# Altium PCB E17-PDU-PCB.PcbDoc
Units mil, origin at the board's own origin, x right, y up, seen from the top; angles counter-clockwise.
Board outline 3061.02 x 4267.72 mil, 2 copper layers (Top Layer, Bottom Layer); 119 components, 92 nets, 474 pads, 36 vias.
Unrouted connection lines stored in the file: 2.
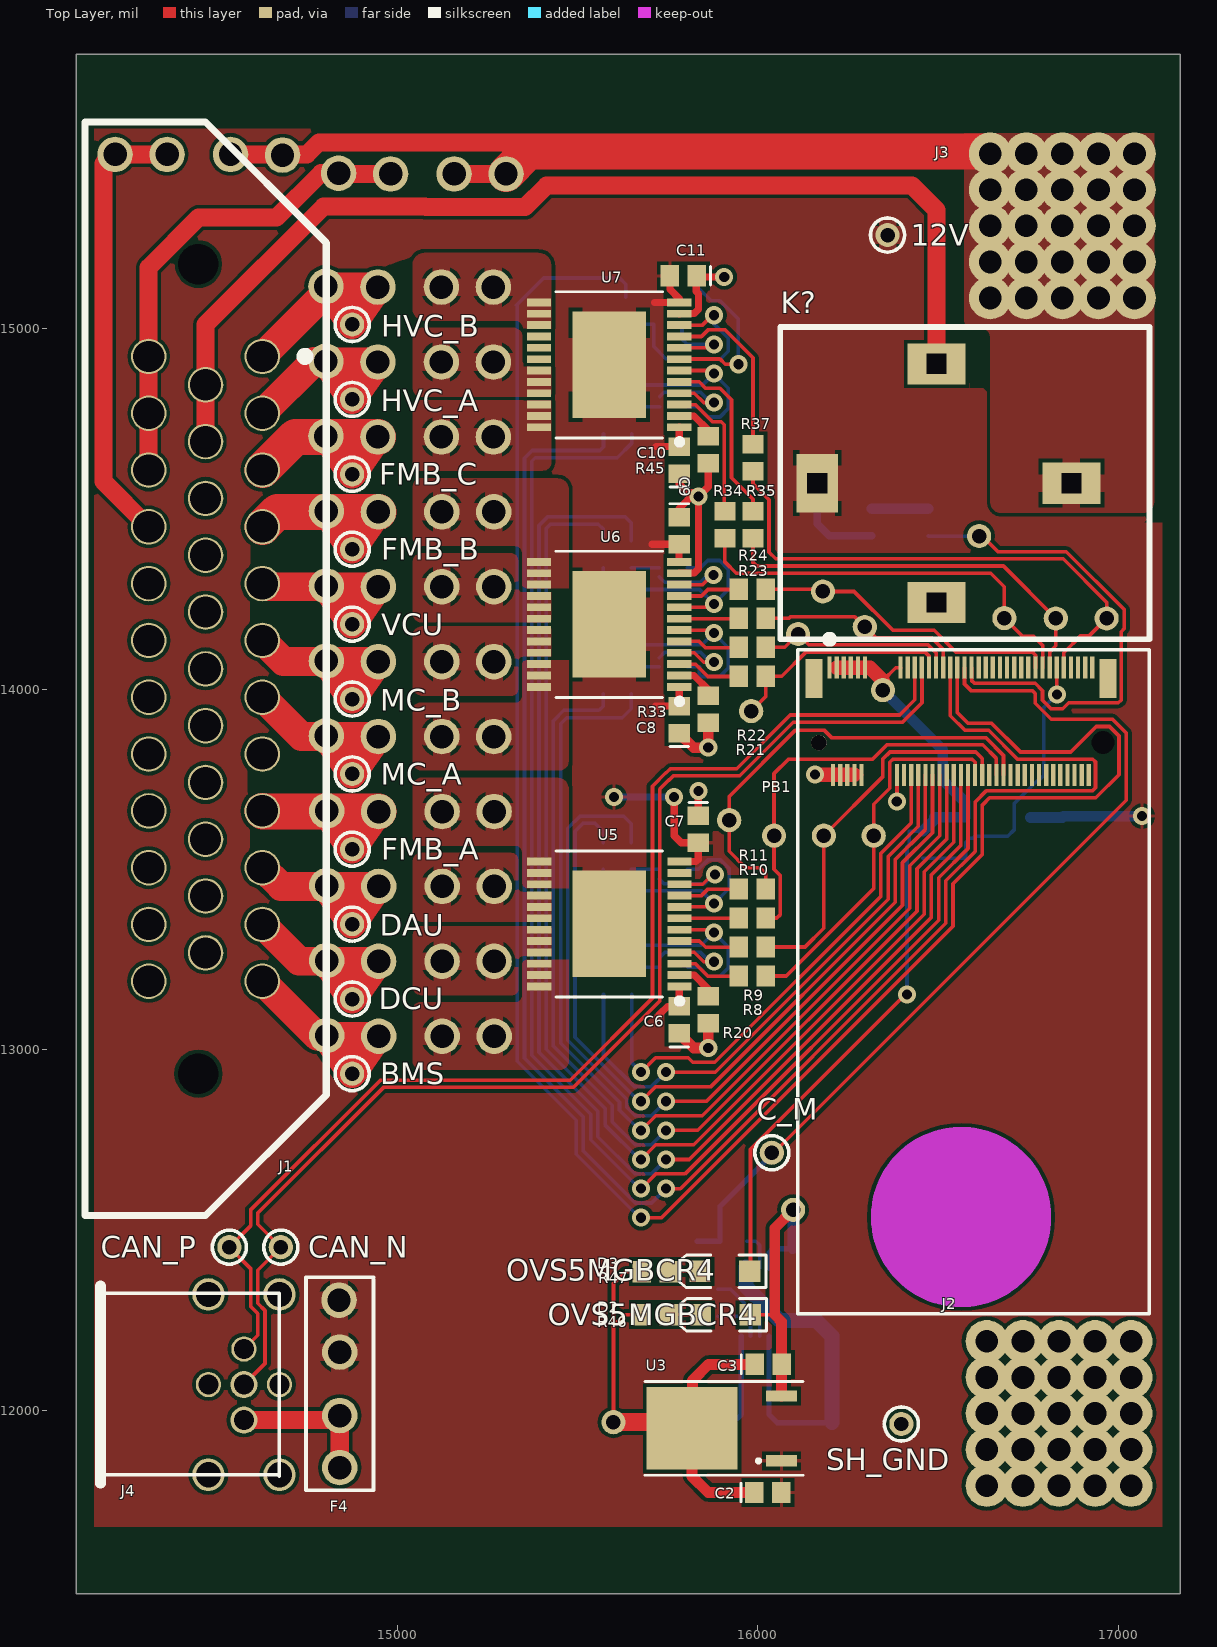
[diagram p0: Top Layer view]
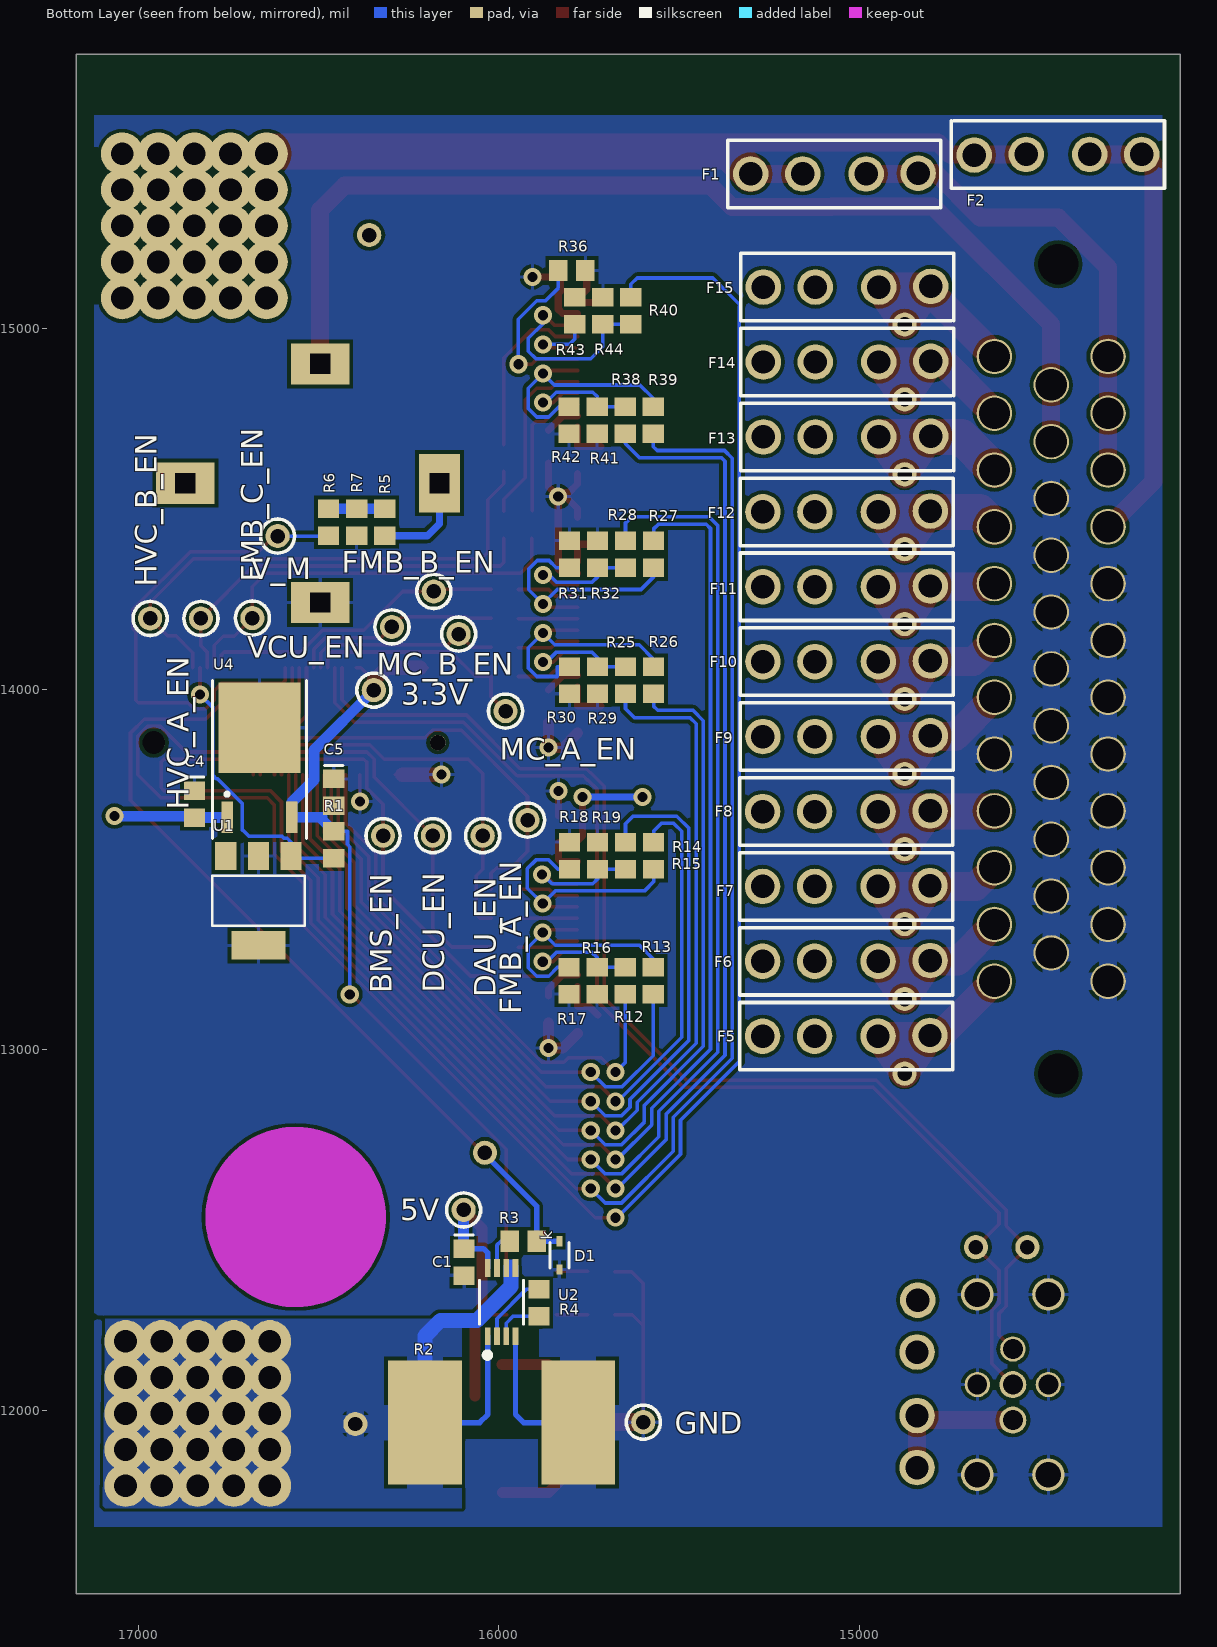
[diagram p1: Bottom Layer view, seen from below]
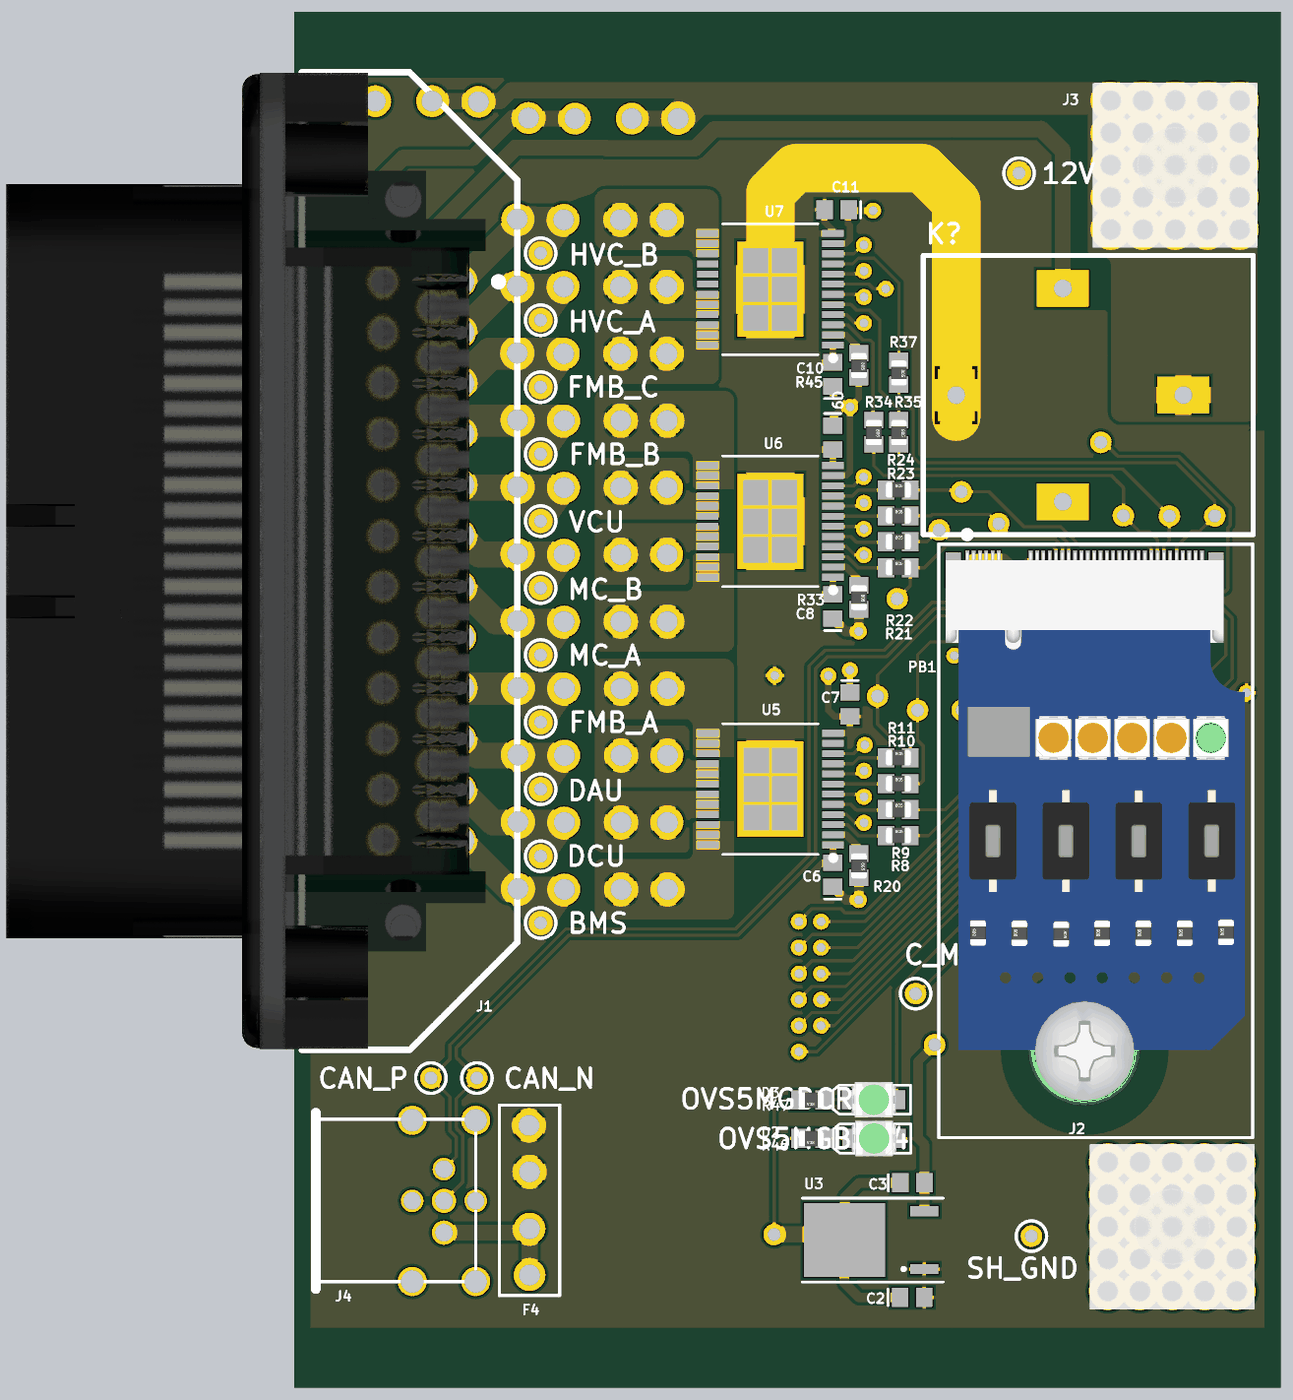
[diagram p2: 3D render of the assembled board from above, using the file's embedded part models]
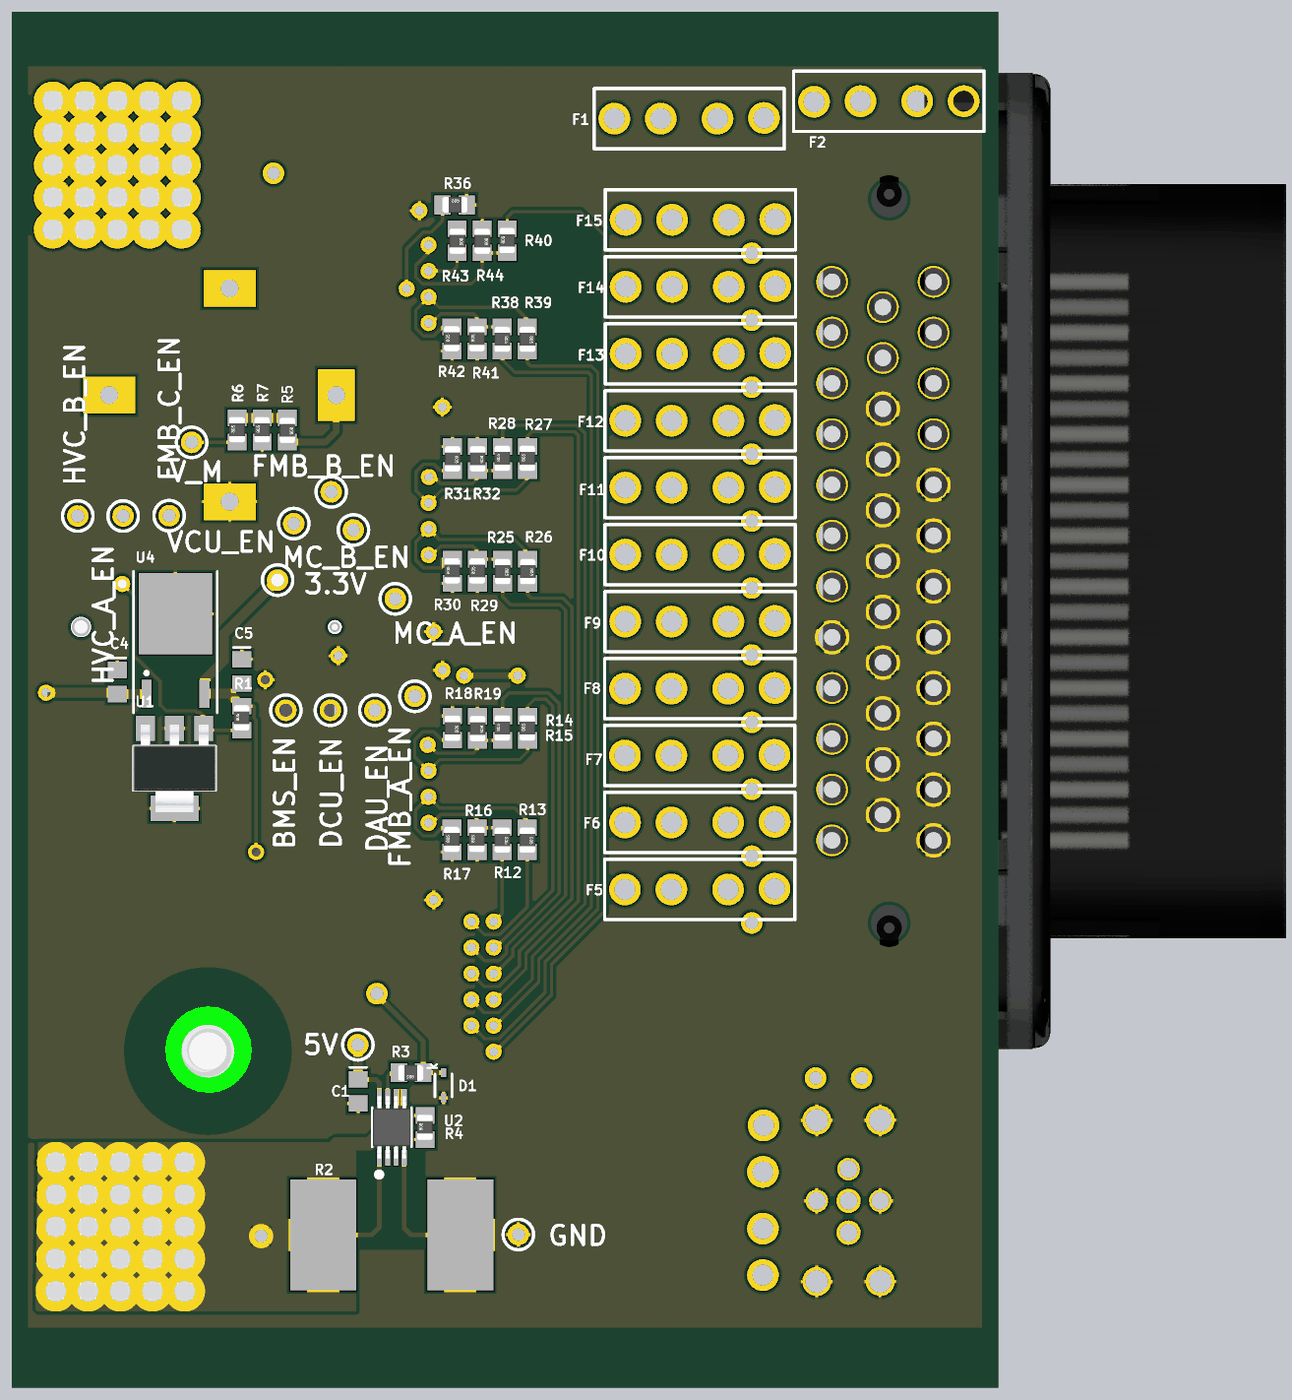
[diagram p3: 3D render of the assembled board from below, using the file's embedded part models]

## Layer stack, top to bottom
Top Solder: solder mask 0.4, Solder Resist, Dk 3.5
Top Layer: signal copper 1.4
Dielectric 1: dielectric 12.6, FR-4, Dk 4.8
Bottom Layer: signal copper 1.4
Bottom Solder: solder mask 0.4, Solder Resist, Dk 3.5

## Board outline
14110.24,11492.13 17171.26,11492.13 17171.26,15759.84 14110.23,15759.84

## Design rules (kind name [scope] priority, off if disabled: settings)
BoardOutlineClearance [All] p1: gap=50 ignorepadtopadclearanceinfootprint=FALSE
Clearance Clearance_PB-Pads [(InComponent('PB1') AND IsPad) vs IsTrack] p1: gap=8 ignorepadtopadclearanceinfootprint=FALSE except(0: Arc-Hole Track-Hole SMDPad-Hole THPad-Hole Via-Hole Fill-Hole Poly-Hole Region-Hole Text-Hole)
Clearance Clearance_Pads [IsPad vs IsPad] p2: gap=7.87 ignorepadtopadclearanceinfootprint=FALSE except(0: Arc-Hole Track-Hole SMDPad-Hole THPad-Hole Via-Hole Fill-Hole Poly-Hole Region-Hole Text-Hole)
Clearance [All] p3: gap=10 ignorepadtopadclearanceinfootprint=FALSE except(0: Arc-Hole Track-Hole SMDPad-Hole THPad-Hole Via-Hole Fill-Hole Poly-Hole Region-Hole Text-Hole)
DiffPairsRouting [All] p1: maxlimit=10 minlimit=10 mostfreqgap=10 toplayer_minwidth=10 toplayer_maxwidth=15 toplayer_prefwidth=10 bottomlayer_minwidth=10 bottomlayer_maxwidth=15 bottomlayer_prefwidth=10 maxuncoupledlength=500
HoleSize [All] p1: absolutevalues=TRUE maxlimit=1000 minlimit=1 maxpercent=80.000 minpercent=20.000
PolygonConnect PolygonConnect_LOAD-SWITCH_GND [HasFootprint('PowerSSO-24') vs InNet('12V')] p1: connectstyle=Relief reliefconductorwidth=150 reliefentries=4 polygonreliefangle="90 Angle" airgapwidth=10
PolygonConnect PolygonConnect_LOAD-SWITCHES [All vs HasFootprint('PowerSSO-24')] p2: connectstyle=Direct reliefconductorwidth=100 reliefentries=4 polygonreliefangle="90 Angle" airgapwidth=10
PolygonConnect PolygonConnect_SHANKS [All vs HasFootprint('7461098')] p3: connectstyle=Direct reliefconductorwidth=10 reliefentries=4 polygonreliefangle="90 Angle" airgapwidth=10
PolygonConnect PolygonConnect_Relay [InNet('12V') vs HasFootprint('CB1AH-P-12V')] p4: connectstyle=Relief reliefconductorwidth=100 reliefentries=4 polygonreliefangle="90 Angle" airgapwidth=10
PolygonConnect PolygonConnect_Curr-Resistor [InNet('GND') OR InNet('SHANK_GND') vs HasFootprint('PSR500HTQFC0L20')] p5: connectstyle=Relief reliefconductorwidth=100 reliefentries=4 polygonreliefangle="90 Angle" airgapwidth=10
PolygonConnect PolygonConnect_GND [InNet('GND') vs HasFootprint('TE-1-776163-1')] p6: connectstyle=Relief reliefconductorwidth=50 reliefentries=4 polygonreliefangle="90 Angle" airgapwidth=10
PolygonConnect PolygonConnect_12V [InNet('12V') vs (HasFootprint('BK-6013') OR HasFootprint('PowerSSO-24') OR HasFootprint('TEST POINT 5000K'))] p7: connectstyle=Relief reliefconductorwidth=50 reliefentries=4 polygonreliefangle="90 Angle" airgapwidth=10
PolygonConnect PolygonConnect_Loads [(InNet('NetF5_1') OR InNet('NetF6_1') OR InNet('NetF7_1') OR InNet('NetF8_1') OR InNet('NetF9_1') OR InNet('NetF10_1') OR InNet('NetF11_1') OR InNet('NetF12_1') OR InNet('NetF13_1') OR InNet('NetF14_1') OR InNet('NetF15_1') OR InNet('NetF2_3') OR InNet('NetF1_3') OR InNet('NetF4_1')OR InNet('SHANK_GND') OR InNet('NetF3_3') OR InNet('NetF1_1')) vs (InNet('NetF5_1') OR InNet('NetF6_1') OR InNet('NetF7_1') OR InNet('NetF8_1') OR InNet('NetF9_1') OR InNet('NetF10_1') OR InNet('NetF11_1') OR InNet('NetF12_1') OR InNet('NetF13_1') OR InNet('NetF14_1') OR InNet('NetF15_1') OR InNet('NetF2_3') OR InNet('NetF1_3') OR InNet('NetF4_1') OR InNet('SHANK_GND') OR InNet('NetF3_3') OR InNet('NetF1_1'))] p8: connectstyle=Relief reliefconductorwidth=50 reliefentries=4 polygonreliefangle="90 Angle" airgapwidth=10
PolygonConnect [All] p9: connectstyle=Relief reliefconductorwidth=10 reliefentries=4 polygonreliefangle="90 Angle" airgapwidth=10
RoutingVias [All] p1: holewidth=28 width=50 viastyle="Through Hole" minholewidth=28 minwidth=50 maxholewidth=28 maxwidth=50
SilkToSilkClearance [All] p1: silktosilkclearance=0
SolderMaskExpansion [All] p1: expansion=4
Width [All] p1: maxlimit=1000 minlimit=10 preferedwidth=10
27 further rules are at their usual default settings.

## Classes and differential pairs
component class Regulators: 3.3V 5V C2 C3 C4 C5 D2 D3 R46 R47 U3 U4
component class Gate_3: C10 C11 F13 F14 F15 R34 R35 R36 R37 R38 R39 R40 R41 R42 R43 R44 R45 U7
component class Gate_2: C8 C9 F9 F10 F11 F12 R21 R22 R23 R24 R25 R26 R27 R28 R29 R30 R31 R32 R33 U6
component class Gate_1: C6 C7 F5 F6 F7 F8 R8 R9 R10 R11 R12 R13 R14 R15 R16 R17 R18 R19 R20 U5
component class E16-PDB-1-MASTER: K?
component class Connectors: 12V BMS C1 C_M D1 DAU DCU F1 F2 F4 FMB_A FMB_B FMB_C GND HVC_A HVC_B J1 J2 J3 J4 MC_A MC_B R2 R3 R4 R5 R6 R7 SH_GND U2 V_M VCU
component class Processor: BMS_EN CAN_N CAN_P DAU_EN DCU_EN FMB_A_EN FMB_B_EN FMB_C_EN HVC_A_EN HVC_B_EN MC_A_EN MC_B_EN PB1 R1 U1 VCU_EN
differential pair CAN: +CAN_P -CAN_N

## Components (designator, comment, footprint, x,y, rotation, side; value= is the part's Value field where it differs from the comment)
3.3V "Test Point" "TEST POINT 5000K" 16346.46,13997.05 r270 bottom
5V "Test Point" "TEST POINT 5000K" 16097.44,12556.1 r180 bottom
12V "Test Point" "TEST POINT 5000K" 16359.25,15258.86 r0 top
BMS "Test Point" "TEST POINT 5000K" 14875,12933.78 r0 top
BMS_EN "Test Point" "TEST POINT 5000K" 16320.87,13593.5 r270 bottom
C1 "Cap" C0805 16096.46,12411.42 r270 bottom
C2 "Cap" C0805 16027.56,11772.64 r0 top
C3 "Cap" C0805 16028.54,12127.95 r0 top
C4 "Cap" C0805 16843.5,13681.1 r270 bottom
C5 "Cap" C0805 16457.68,13713.58 r270 bottom
C6 "Cap" C0805 15781.5,13082.95 r90 top
C7 "Cap" C0805 15834.65,13611.22 r270 top
C8 "Cap" C0805 15781.5,13915.35 r90 top
C9 "Cap" C0805 15781.5,14438.98 r270 top
C10 "Cap" C0805 15781.5,14634.84 r90 top
C11 "Cap" C0805 15793.31,15145.67 r180 top
C_M "Test Point" "TEST POINT 5000K" 16038.39,12714.57 r180 top
CAN_N "Test Point" "TEST POINT 5000K" 14677.17,12452.76 r90 top
CAN_P "Test Point" "TEST POINT 5000K" 14534.45,12452.76 r90 top
D1 "D_DDZ3V3BSF-7" DDZ3V3BSF-7 15831.69,12430.12 r90 bottom
D2 "OVS5MGBCR4" OVS5MGBCR4 15909.45,12265.31 r180 top
D3 "OVS5MGBCR4" OVS5MGBCR4 15908.46,12385.83 r180 top
DAU "Test Point" "TEST POINT 5000K" 14875,13348.43 r0 top
DAU_EN "Test Point" "TEST POINT 5000K" 16044.62,13593.5 r270 bottom
DCU "Test Point" "TEST POINT 5000K" 14875,13140.75 r0 top
DCU_EN "Test Point" "TEST POINT 5000K" 16182.74,13593.5 r270 bottom
F1 "BK-6013" BK-6013 15069.49,15428.15 r180 bottom
F2 "BK-6013" BK-6013 14449.8,15482.28 r0 bottom
F4 "BK-6013" BK-6013 14840.55,12073.82 r90 top
F5 "BK-6013" BK-6013 15036.61,13037.68 r180 bottom
F6 "BK-6013" BK-6013 15036.42,13245.35 r180 bottom
F7 "BK-6013" BK-6013 15036.61,13453.03 r180 bottom
F8 "BK-6013" BK-6013 15036.42,13660.43 r180 bottom
F9 "BK-6013" BK-6013 15035.63,13868.39 r180 bottom
F10 "BK-6013" BK-6013 15035.63,14076.06 r180 bottom
F11 "BK-6013" BK-6013 15035.63,14283.74 r180 bottom
F12 "BK-6013" BK-6013 15035.63,14491.42 r180 bottom
F13 "BK-6013" BK-6013 15034.45,14699.1 r180 bottom
F14 "BK-6013" BK-6013 15034.45,14906.77 r180 bottom
F15 "BK-6013" BK-6013 15034.45,15114.45 r180 bottom
FMB_A "Test Point" "TEST POINT 5000K" 14875,13556.1 r90 top
FMB_A_EN "Test Point" "TEST POINT 5000K" 15920.28,13636.81 r270 bottom
FMB_B "Test Point" "TEST POINT 5000K" 14875,14387.8 r90 top
FMB_B_EN "Test Point" "TEST POINT 5000K" 16180.12,14270.67 r90 bottom
FMB_C "Test Point" "TEST POINT 5000K" 14875,14595.47 r90 top
FMB_C_EN "Test Point" "TEST POINT 5000K" 16683.07,14196.85 r180 bottom
GND "Test Point" "TEST POINT 5000K" 15599.41,11967.52 r90 bottom
HVC_A "Test Point" "TEST POINT 5000K" 14875,14803.15 r90 top
HVC_A_EN "Test Point" "TEST POINT 5000K" 16825.79,14195.87 r180 bottom
HVC_B "Test Point" "TEST POINT 5000K" 14875,15010.83 r90 top
HVC_B_EN "Test Point" "TEST POINT 5000K" 16966.54,14195.87 r180 bottom
J1 "TE-1-776163-1" TE-1-776163-1 14625.98,14922.24 r270 top
J2 "7461098" 7461098 16634.65,11791.73 r90 top
J3 "7461098" 7461098 16643.9,15084.25 r90 top
J4 "MOLEX 84864-9003" "MOLEX 84864-9003" 14574.88,12071.85 r90 top
K? "CB1AH-P-12V" CB1AH-P-12V 16495.08,14570.87 r180 top
MC_A "Test Point" "TEST POINT 5000K" 14875,13764.76 r90 top
MC_A_EN "Test Point" "TEST POINT 5000K" 15981.3,13938.98 r270 bottom
MC_B "Test Point" "TEST POINT 5000K" 14875,13972.44 r90 top
MC_B_EN "Test Point" "TEST POINT 5000K" 16111.22,14152.56 r90 bottom
PB1 "ProcBoardRev2" PROC_BOARD 16198.51,13370.39 r0 top
R1 "Res" 2012[0805] 16457.68,13568.9 r90 bottom
R2 "R_PSR500HTQFC0L20" PSR500HTQFC0L20 15992.13,11966.54 r0 bottom
R3 "Res" 2012[0805] 15932.09,12469.49 r0 bottom
R4 "Res" 2012[0805] 15888.78,12299.21 r90 bottom
R5 "Res" 2012[0805] 16316.32,14462.58 r270 bottom
R6 "Res" 2012[0805] 16471.83,14462.58 r90 bottom
R7 "Res" 2012[0805] 16394.08,14462.58 r90 bottom
R8 "Res" 2012[0805] 15984.25,13204.72 r0 top
R9 "Res" 2012[0805] 15984.25,13285.1 r0 top
R10 "Res" 2012[0805] 15984.25,13365.49 r0 top
R11 "Res" 2012[0805] 15984.25,13445.87 r0 top
R12 "Res" 2012[0805] 15649.61,13191.93 r270 bottom
R13 "Res" 2012[0805] 15571.85,13191.93 r270 bottom
R14 "Res" 2012[0805] 15570.87,13537.4 r90 bottom
R15 "Res" 2012[0805] 15648.62,13537.4 r90 bottom
R16 "Res" 2012[0805] 15727.36,13191.93 r90 bottom
R17 "Res" 2012[0805] 15805.12,13191.93 r90 bottom
R18 "Res" 2012[0805] 15804.13,13538.39 r270 bottom
R19 "Res" 2012[0805] 15726.38,13537.4 r270 bottom
R20 "Res" 2012[0805] 15862.2,13111.5 r270 top
R21 "Res" 2012[0805] 15984.25,14035.43 r0 top
R22 "Res" 2012[0805] 15984.25,14115.81 r0 top
R23 "Res" 2012[0805] 15984.25,14196.19 r0 top
R24 "Res" 2012[0805] 15984.25,14276.57 r0 top
R25 "Res" 2012[0805] 15648.62,14024.61 r270 bottom
R26 "Res" 2012[0805] 15570.87,14024.61 r270 bottom
R27 "Res" 2012[0805] 15570.87,14374.02 r90 bottom
R28 "Res" 2012[0805] 15648.62,14374.02 r90 bottom
R29 "Res" 2012[0805] 15726.38,14024.61 r90 bottom
R30 "Res" 2012[0805] 15804.13,14024.61 r90 bottom
R31 "Res" 2012[0805] 15804.13,14374.02 r270 bottom
R32 "Res" 2012[0805] 15726.38,14374.02 r270 bottom
R33 "Res" 2012[0805] 15862.2,13943.9 r270 top
R34 "Res" 2012[0805] 15908.46,14455.71 r270 top
R35 "Res" 2012[0805] 15986.22,14455.71 r270 top
R36 "Res" 2012[0805] 15797.24,15160.43 r180 bottom
R37 "Res" 2012[0805] 15986.22,14640.75 r270 top
R38 "Res" 2012[0805] 15649.61,14745.08 r270 bottom
R39 "Res" 2012[0805] 15571.85,14745.08 r270 bottom
R40 "Res" 2012[0805] 15633.86,15049.21 r90 bottom
R41 "Res" 2012[0805] 15727.36,14745.08 r90 bottom
R42 "Res" 2012[0805] 15805.12,14745.08 r90 bottom
R43 "Res" 2012[0805] 15789.37,15049.21 r270 bottom
R44 "Res" 2012[0805] 15711.61,15049.21 r270 bottom
R45 "Res" 2012[0805] 15862.2,14663.39 r270 top
R46 "Res" 2012[0805] 15715.55,12265.75 r180 top
R47 "Res" 2012[0805] 15715.55,12384.84 r180 top
SH_GND "Test Point" "TEST POINT 5000K" 16397.64,11962.6 r180 top
U1 "DS2401" SOT-223-3L 16666.34,13413.39 r0 bottom
U2 "U_INA826AIDGKR - not in use" 8-TSSOP 15992.13,12300.2 r90 bottom
U3 "UA78M05CKVURG3" TO-252-3 15691.54,11950.35 r90 top
U4 "UA78M33CKVURG3" TO-252-3 16663.39,14018.7 r180 bottom
U5 "U_VNQ5027AK-E" PowerSSO-24 15587.83,13348.82 r180 top
U6 "U_VNQ5027AK-E" PowerSSO-24 15587.6,14179.41 r180 top
U7 "U_VNQ5027AK-E" PowerSSO-24 15587.6,14898.9 r180 top
V_M "Test Point" "TEST POINT 5000K" 16613.19,14424.21 r0 bottom
VCU "Test Point" "TEST POINT 5000K" 14875,14180.12 r0 top
VCU_EN "Test Point" "TEST POINT 5000K" 16296.26,14172.24 r90 bottom

## Footprints (in the part's own frame and the unit in brackets; to place one, negate y for a bottom-side part, rotate by r counter-clockwise, add the part's x,y. Pads: shape width x height; smd on the part's side, far side on the other; paste and mask are expansions set on the pad)
8-TSSOP [mm] "For U_INA826AIDGKR"
  rect 1.26x0.4 smd mask+0.076: 1(-2.4,0.975) 2(-2.4,0.325) 3(-2.4,-0.325) 4(-2.4,-0.975) 5(2.4,-0.975) 6(2.4,-0.325) 7(2.4,0.325) 8(2.4,0.975)
  silkscreen extent -3.92,-1.55 1.55,1.55, body extent -2.45,-1.5 2.45,1.5, height 0.92
2012[0805] [mm] "Chip Resistor; Body 2.0 x 1.3 mm (LxW typ)"
  rect 1.3x1.5 smd: 1(-0.95,0) 2(0.95,0)
  body extent -0.97,-0.61 1.03,0.64, height 0.77
7461098 [mm] "POWER ELEMENT SHANK M6 25PIN"
  round 3 hole 1.6: 1(0,0) 1(0,-2.54) 1(0,-5.08) 1(0,-7.62) 1(0,-10.16) 1(2.54,-2.54) 1(2.54,0) 1(2.54,-7.62) 1(2.54,-5.08) 1(2.54,-10.16) 1(5.08,-5.08) 1(5.08,-2.54) 1(5.08,0) 1(5.08,-10.16) 1(5.08,-7.62) 1(7.62,-10.16) 1(7.62,-7.62) 1(7.62,-5.08) 1(7.62,-2.54) 1(7.62,0) 1(10.16,-10.16) 1(10.16,-7.62) 1(10.16,-5.08) 1(10.16,-2.54) 1(10.16,0)
  body extent -1.42,-11.58 11.58,1.42, height 15.5
BK-6013 [mm] "FUSE HOLDER BLADE PCB"
  round 2.5 hole 1.65: 1(-5.895,0) 2(-2.235,0) 3(2.235,0) 4(5.895,0.051)
  silkscreen extent -7.5,-2.37 7.5,2.37
C0805 [mm] "Chip Capacitor; Body 2.0 x 1.2 mm (LxW typ)"
  rect 1.3x1.5 smd: 1(-0.95,0) 2(0.95,0)
  silkscreen extent -1.9,-0.65 -1.9,0.65
CB1AH-P-12V [mm] "Relay 12V 70A SPST"
  rect 4.1x2.9 hole 1.4 square: 30(-9.5,0) 85(0,-8.4) 86(0,8.4)
  rect 2.9x4.1 hole 1.4 square: 87(8.4,0)
  silkscreen extent -15,-11 11,11, body extent -15,-11 11,11, height 25
DDZ3V3BSF-7 [mm] "ZENER DIODE 3.43V"
  rect 0.71x0.403 smd mask+0.127: 1(-0.995,0) 2(0.995,0)
  silkscreen extent -0.9,-0.67 0.9,0.67, body extent -0.9,-0.67 0.9,0.67, height 0.75
"MOLEX 84864-9003" [mil]
  round 70 hole 55: 1(0,98.5) 3(0,-98.5) 4(98.5,0)
  round 75 hole 55: 2(-98.5,0) 5(0,0)
  round 90 hole 70: 6(250,98.5) 7(250,-98.5) 8(-250,98.5) 9(-250,-98.5)
  silkscreen extent -274,-99 274,400, body extent -299,-148 299,452, height 710
OVS5MGBCR4 [mm] "SMT LED; 2 Flat Leads; GREEN"
  rect 1.5x1.5 smd: 1(-1.75,0) 2(1.75,0)
  silkscreen extent -2.9,-1.15 3.2,1.15, body extent -1.75,-1.4 1.75,1.4, height 1.6
PowerSSO-24 [mm] "For U_VNQ5027AK-E"
  rect 1.7x0.55 smd mask+0.076: 1(-4.932,4.4) 2(-4.932,3.6) 3(-4.932,2.8) 4(-4.932,2) 5(-4.932,1.2) 6(-4.932,0.4) 7(-4.932,-0.4) 8(-4.932,-1.2) 9(-4.932,-2) 10(-4.932,-2.8) 11(-4.932,-3.6) 12(-4.932,-4.4) 13(4.933,-4.4) 14(4.933,-3.6) 15(4.933,-2.8) 16(4.933,-2) 17(4.933,-1.2) 18(4.933,-0.4) 19(4.933,0.4) 20(4.933,1.2) 21(4.933,2) 22(4.933,2.8) 23(4.933,3.6) 24(4.933,4.4)
  rect 5.2x7.5 smd paste-3.6: 25(0,0)
  silkscreen extent -5.15,-5.15 3.75,5.62, body extent -3.75,-5.15 3.75,5.15, height 2.45
PROC_BOARD [mm]
  rect 1.2x2.75 smd: 0(-1.1,16.725) 0(19.6,16.725)
  round 1.1 hole 1.1 unplated paste+0: 0(-0.75,12.225)
  round 0 hole 6.35 unplated: 0(9.258,-21.183)
  round 1.524 hole 1.6 unplated: 0(19.25,12.225)
  rect 0.3x1.55 smd: 1(0,17.5) 2(0.25,9.95) 3(0.5,17.5) 4(0.75,9.95) 5(1,17.5) 6(1.25,9.95) 7(1.5,17.5) 8(1.75,9.95) 9(2,17.5) 10(2.25,9.95) 11(2.5,17.5) 12(4.75,9.95) 13(5,17.5) 14(5.25,9.95) 15(5.5,17.5) 16(5.75,9.95) 17(6,17.5) 18(6.25,9.95) 19(6.5,17.5) 20(6.75,9.95) 21(7,17.5) 22(7.25,9.95) 23(7.5,17.5) 24(7.75,9.95) 25(8,17.5) 26(8.25,9.95) 27(8.5,17.5) 28(8.75,9.95) 29(9,17.5) 30(9.25,9.95) 31(9.5,17.5) 32(9.75,9.95) 33(10,17.5) 34(10.25,9.95) 35(10.5,17.5) 36(10.75,9.95) 37(11,17.5) 38(11.25,9.95) 39(11.5,17.5) 40(11.75,9.95) 41(12,17.5) 42(12.25,9.95) 43(12.5,17.5) 44(12.75,9.95) 45(13,17.5) 46(13.25,9.95) 47(13.5,17.5) 48(13.75,9.95) 49(14,17.5) 50(14.25,9.95) 51(14.5,17.5) 52(14.75,9.95) 53(15,17.5) 54(15.25,9.95) 55(15.5,17.5) 56(15.75,9.95) 57(16,17.5) 58(16.25,9.95) 59(16.5,17.5) 60(16.75,9.95) 61(17,17.5) 62(17.25,9.95) 63(17.5,17.5) 64(17.75,9.95) 65(18,17.5) 66(18.25,9.95) 67(18.5,17.5)
  Keep-Out Layer circle w6.35: c9.258,-21.183 r3.175
  silkscreen extent -2.25,-28 22.5,19.75, body extent -1.7,-25.44 21.89,18.08, height 6.34
PSR500HTQFC0L20 [mm] "Resistor 0.0005ohm 5W Current Sense"
  rect 5.2x8.75 smd mask+0.127: 1(-5.4,0) 2(5.4,0)
SOT-223-3L [mm] "4-lead SOT-223"
  rect 3.8x2 smd mask+0.07: 1(0,3.15)
  rect 1.5x2 smd mask+0.07: 2(-2.3,-3.15) 3(2.3,-3.15) 4(0,-3.15)
  silkscreen extent -3.25,-1.75 3.25,1.75, body extent -3.25,-3.45 3.25,3.45, height 1.6
TE-1-776163-1 [mm] "CONN HEADER 35POS R/A GOLD BLACK"
  round 0 hole 2.85 unplated: 0(-6.5,-4.5) 0(50.5,-4.5)
  round 2.5 hole 2.2: 1(0,0) 2(4,0) 3(8,0) 4(12,0) 5(16,0) 6(20,0) 7(24,0) 8(28,0) 9(32,0) 10(36,0) 11(40,0) 12(44,0) 13(2,-4) 14(6,-4) 15(10,-4) 16(14,-4) 17(18,-4) 18(22,-4) 19(26,-4) 20(30,-4) 21(34,-4) 22(38,-4) 23(42,-4) 24(0,-8) 25(4,-8) 26(8,-8) 27(12,-8) 28(16,-8) 29(20,-8) 30(24,-8) 31(28,-8) 32(32,-8) 33(36,-8) 34(40,-8) 35(44,-8)
  silkscreen extent -16.5,-12.5 60.5,4.5, body extent -16.45,-35.8 60.45,2, height 27.77
"TEST POINT 5000K" [mm] "Test Point, 5000 Keystone Series, 0.040\" Hole"
  round 1.7 hole 1.02 mask+0.1: 1(0,0)
  silkscreen extent -1.2,-1.2 1.2,1.2
TO-252-3 [mm] "D-PAK/TO-252-3; 3 Leads"
  rect 0.8x2.2 smd: 1(-2.28,-9.5) 3(2.28,-9.5)
  rect 5.8x6.4 smd: 2(0,-3.2)
  silkscreen extent -3.3,-11 3.3,0.13

## Part data
3.3V 5V 12V BMS BMS_EN C_M CAN_N CAN_P DAU DAU_EN DCU DCU_EN FMB_A FMB_A_EN FMB_B FMB_B_EN FMB_C FMB_C_EN GND HVC_A HVC_A_EN HVC_B HVC_B_EN MC_A MC_A_EN MC_B MC_B_EN SH_GND V_M VCU VCU_EN: "5000-5004, 5015-5019 Keystone Electronics"
C1 C2 C3 C4 C5 C6 C7 C8 C9 C10 C11: "Capacitor"
D1: "ZENER DIODE 3.43V"
D2 D3: "Typical GREEN LED"
F1 F2 F4 F5 F6 F7 F8 F9 F10 F11 F12 F13 F14 F15: "FUSE HOLDER BLADE PCB"
J1: "CONN HEADER 35POS R/A GOLD BLACK"
J2 J3: "POWER ELEMENT SHANK M6 25PIN"
J4: "CAN Micro-Change M12, Right Angle, Male"
K?: "Relay 12V 70A SPST"
PB1: "Processor board that carries the STM32F072RB"
R1 R3 R4 R5 R6 R7 R8 R9 R10 R11 R12 R13 R14 R15 R16 R17 R18 R19 R20 R21 R22 R23 R24 R25 R26 R27 R28 R29 R30 R31 R32 R33 R34 R35 R36 R37 R38 R39 R40 R41 R42 R43 R44 R45 R46 R47: "Surface Mount Resistor"
R2: "Resistor 0.0005ohm 5W Current Sense"
U1: "IC SILICON SERIAL NUMBER SOT223"
U2: "Opamp Instrumentation 2.7-36V SS"
U3: "5.0V Regulator"
U4: "3.3V Regulator"
U5 U6 U7: "LOAD CHANNEL HIGH SIDE 42 A 4 Channel"

## Via types
v1: diameter 50, hole 28, Top Layer to Bottom Layer, 36 vias

## Nets (pads, with @x,y where several pads share a name; then routed paths per layer and width w, separated by ;. In a path a pad name is that pad's centre, name@x,y a point inside that pad or via, vN(x,y) a via of type N, cw(c..) or ccw(c..) an arc to the next point about the centre after c; other vN are vias at no path point)
3.3V: 3.3V.1 C5.2 D3.1 PB1.1 PB1.3 PB1.5 PB1.7 PB1.9 PB1.11 PB1.13 R1.2 U4.3 | length 2243.4
  Top Layer w10: D3.1@15979.33,12394.69 15979.33,12724.05 16409.06,13153.78 v1(16413.15,13153.78) ; PB1.1 PB1.3 ; 3.3V.1@16346.46,14023.62 16382.2,14059.36 PB1.13
  Top Layer w40: PB1.3 PB1.5 PB1.7 PB1.9 PB1.11 16310.72,14059.36 3.3V.1@16346.46,14023.62
  Bottom Layer w10: v1(16413.15,13153.78) 16413.15,13563.3 16419.29,13569.44 16419.29,13606.3 R1.2
  Bottom Layer w30: 3.3V.1 16512.2,13831.3 16512.2,13748.03 16573.62,13686.61 U4.3 16489.17,13644.69 16489.17,13637.8 R1.2
5V: 5V.1 C1.1 C3.2 D2.1 U2.8 U3.3 | length 834
  Top Layer w10: D2.1 16046.46,12265.31
  Top Layer w30: U3.3 16065.55,12246.22 16046.46,12265.31 16046.46,12505.12 5V.1
  Bottom Layer w15: U2.8 16030.51,12437.01 16042.32,12448.82 C1.1
  Bottom Layer w30: C1.1 16097.44,12449.8 5V.1
12V: 12V.1 C2.2 C4.2 C6.2 C7.2 C8.2 C9.2 C10.2 C11.2 F4.3 F4.4 K?.87 R5.2 U3.1 U4.1 U5.1 U5.12 U5.25 U6.1 U6.12 U6.25 U7.1 U7.12 U7.25 | length 1671.7
  Top Layer w20: 15706.69,14401.58 C9.2 U6.12@15781.5,14352.93 ; 15713.31,15072.13 U7.12 15781.79,15082.38 15755.91,15108.27 C11.2 ; 15716.54,13952.76 C8.2 ; 15717.52,14672.24 C10.2 ; 15725.39,13096.46 15749.29,13120.35 C6.2 15782.03,13120.89 U5.1 ; v1(15767.72,13700.79) 15767.72,13593.5 15787.4,13573.82 C7.2 15834.65,13528.54 15828.15,13522.05 U5.12 ; C8.2@15781.79,13952.76 U6.1 ; C10.2@15781.79,14672.54 U7.1
  Bottom Layer w20: v1(15601.38,13700.79) v1(15767.72,13700.79) ; K?.87 16164.37,14458.66 16197.85,14425.18 R5.2
  Bottom Layer w30: U4.1@16755.31,13643.7 C4.2 16847.44,13647.64 v1(17064.96,13647.64)
BRB_OUT: F2.1 F2.2 J1.27 | length 1204.1
  Top Layer w50: F2.1@14185.24,15457.68 14185.24,14575.59 J1.27 ; F2.1 F2.2
CAN_N: CAN_N.1 J4.5 PB1.19 | length 3429.7
  Top Layer w10: J4.5 14633.38,12130.35 14633.38,12277 14613.38,12297 14613.38,12388.97 CAN_N.1 14613.38,12516.54 14613.38,12547.43 14961.61,12895.67 15487.93,12895.67 15727.68,13135.42 15727.68,13722.76 15752.95,13748.03 15754.45,13748.03 15765.91,13759.49 15949.23,13759.49 16097.89,13908.15 16401,13908.15 16454.73,13961.87 PB1.19@16454.73,14059.36
CAN_P: CAN_P.1 J4.4 PB1.17 | length 3318.9
  Top Layer w10: J4.4 14613.38,12208.85 14613.38,12268.71 14593.38,12288.71 14593.38,12393.83 CAN_P.1 14593.38,12511.68 14593.38,12555.72 14953.33,12915.67 15479.65,12915.67 15707.68,13143.7 15707.68,13731.04 15744.67,13768.03 15746.17,13768.03 15757.63,13779.49 15940.94,13779.49 16089.61,13928.15 16392.72,13928.15 16434.73,13970.16 PB1.17
GND: C1.2 C2.1 C3.1 C4.1 C5.1 C6.1 C7.1 C8.1 C9.1 C10.1 C11.1 D1.1 GND.1 J1.8 J1.15 J1.16 J1.17 J1.18 J1.19 J1.20 J1.21 J1.22 J1.23 J1.28 J1.29 J1.30 J1.31 J1.32 J1.33 J1.34 J1.35 J4.1 J4.3 J4.6 J4.7 J4.8 J4.9 K?.86 PB1.2 PB1.4 PB1.6 PB1.8 PB1.10 PB1.12 R2.1 R7.1 R16.1 R17.1 R18.1 R19.1 R20.2 R29.1 R30.1 R31.1 R32.1 R33.2 R36.2 R41.1 R42.1 R43.1 R44.1 R45.2 R46.2 R47.2 U1.1 U1.4 U2.4 U3.2 U4.2 U5.11 U6.11 U7.11 | length 3204.2
  Top Layer w10: GND.1 15599.41,12235.24 ; R46.2 15629.92,12265.75 15599.41,12235.24 ; R47.2 15631.89,12384.84 15599.41,12352.36 15599.41,12235.24 ; PB1.8 PB1.10 ; v1@16385.51,13688.66 PB1.12
  Top Layer w20: C9.1 15781.5,14500.98 15824.8,14544.29 15806.1,14544.29 15781.5,14568.9 C10.1 ; U6.11 15782.46,14321.81 15823.54,14321.81 15835.26,14333.53 v1(15835.26,14533.84) 15862.2,14560.79 R45.2 ; U7.11 15782.46,15041.3 15823.54,15041.3 15835.26,15053.02 15835.26,15095.85 15828.74,15102.36 C11.1@15828.74,15143.7 ; C11.1@15829.72,15142.72 v1(15906.5,15142.72) ; C7.1 v1(15834.65,13717.52)
  Top Layer w30: C6.1 15821.85,13005.2 v1(15862.2,13005.2) R20.2 ; C8.1 15821.85,13837.6 v1(15862.2,13837.6) R33.2 ; C2.1 15862.2,11772.64 15817.52,11817.32 U3.2 15818.5,11951.34 15818.5,12083.27 15863.19,12127.95 C3.1
  Top Layer w40: v1@16159.14,13762.12 PB1.2 PB1.4 PB1.6 PB1.8
  Top Layer w50: GND.1 15800.35,11967.52 U3.2
  Bottom Layer w15: R2.1 15931.1,11966.54 15953.74,11989.17 U2.4
  other v1: 16384.84,13687.99 16158.46,13762.8
NetBMS_1: BMS.1 F5.3 F5.4 J1.12 | length 639.8
  Top Layer w80: J1.12 14778.27,13037.68 F5.3 ; F5.4@14802.36,13039.4 BMS.1 F5.3@14946.46,13037.4
NetBMS_EN_1: BMS_EN.1 PB1.34 R8.2 | length 1046.8
  Top Layer w10: R8.2 16078.48,13204.72 16320.87,13447.11 BMS_EN.1 16320.87,13680.58 16365.51,13725.23 16365.51,13796.92 16374.22,13805.63 16593.65,13805.63 16602.36,13796.92 PB1.34@16602.36,13762.12
NetC_M_1: C_M.1 D1.2 PB1.31 R3.1 | length 2500.4
  Top Layer w10: C_M.1@16040.85,12712.11 17020.88,13692.14 17020.88,13878.4 16983.09,13916.18 16812.94,13916.18 16768.74,13960.38 16768.74,13987.53 16760.42,13995.85 16590.76,13995.85 16572.52,14014.09 PB1.31
  Bottom Layer w15: D1.2@15831.69,12469.69 R3.1@15894.49,12469.69 ; R3.1 15894.69,12565.94 C_M.1@16038.39,12709.65
NetD2_2: D2.2 R46.1 | length 88
  Top Layer w10: R46.1 15840.55,12265.75 D2.2
NetD3_2: D3.2 R47.1 | length 85.6
  Top Layer w10: R47.1@15753.94,12385.83 D3.2
NetDAU_1: DAU.1 F7.3 F7.4 J1.10 | length 598.2
  Top Layer w80: J1.10 14677.87,13453.03 F7.3 ; F7.4@14802.36,13454.05 DAU.1 F7.3@14946.46,13452.05
NetDAU_EN_1: DAU_EN.1 PB1.40 R10.2 | length 1153.1
  Top Layer w10: R10.2 16052.49,13365.49 16062.24,13375.24 16062.24,13482.83 16044.62,13500.45 DAU_EN.1 16044.62,13765.75 16084.5,13805.63 16317.65,13805.63 16357.65,13845.63 16622.87,13845.63 16661.1,13807.4 PB1.40
NetDCU_1: DCU.1 F6.3 F6.4 J1.11 | length 618.8
  Top Layer w80: J1.11 14728.07,13245.35 F6.3 ; F6.4@14802.36,13246.37 DCU.1 F6.3@14946.46,13244.37
NetDCU_EN_1: DCU_EN.1 PB1.36 R9.2 | length 1055.6
  Top Layer w10: R9.2 16130.58,13285.1 16182.74,13337.27 DCU_EN.1 16345.51,13756.27 16345.51,13805.2 16365.94,13825.63 16603.5,13825.63 16621.73,13807.4 PB1.36
NetF1_1: F1.1 F1.2 F2.3 F2.4 J3.1 K?.30 | length 2383.8
  Top Layer w50: F2.3 14749.21,15482.28 14782.48,15515.55 15339.76,15515.55 15364.76,15490.55 ; F1.2 F1.1
  Top Layer w100: F1.1 15359.45,15486.02 ; 15339.76,15490.55 15364.76,15490.55 16425.2,15490.55 16637.6,15490.55 J3.1@16643.9,15484.25
NetF1_3: F1.3 F1.4 J1.24 J1.25 J1.26 | length 1341.3
  Top Layer w50: J1.26 J1.25 J1.24 14311.02,15169.19 14448.92,15307.09 14665.35,15307.09 14788.42,15430.15 F1.4 14839.4,15428.15 F1.3
NetF4_1: F4.1 F4.2 J4.2 | length 414.9
  Top Layer w50: J4.2 14828.07,11973.35 F4.2 F4.1
NetF5_1: F5.1 F5.2 U5.22 U5.23 U5.24
NetF6_1: F6.1 F6.2 U5.19 U5.20 U5.21
NetF7_1: F7.1 F7.2 U5.16 U5.17 U5.18
NetF8_1: F8.1 F8.2 U5.13 U5.14 U5.15
NetF8_3: F8.3 F8.4 FMB_A.1 J1.9 | length 577.3
  Top Layer w80: F8.4@14802.36,13661.73 FMB_A.1 F8.3@14946.46,13659.73
  Top Layer w100: J1.9 14627.95,13660.43 F8.3
NetF9_1: F9.1 F9.2 U6.22 U6.23 U6.24
NetF9_3: F9.3 F9.4 J1.7 MC_A.1 | length 620.9
  Top Layer w80: J1.7 14734.96,13868.39 F9.3 ; F9.4@14802.36,13870.39 MC_A.1 F9.3@14946.46,13868.39
NetF10_1: F10.1 F10.2 U6.19 U6.20 U6.21
NetF10_3: F10.3 F10.4 J1.6 MC_B.1 | length 600.1
  Top Layer w80: J1.6 14684.76,14076.06 F10.3 ; F10.4@14802.36,14078.06 MC_B.1 F10.3@14946.46,14076.06
NetF11_1: F11.1 F11.2 U6.16 U6.17 U6.18
NetF11_3: F11.3 F11.4 J1.5 VCU.1 | length 567.1
  Top Layer w80: J1.5@14634.57,14283.74 F11.3 ; F11.4@14802.36,14285.74 VCU.1 F11.3@14946.46,14283.74
NetF12_1: F12.1 F12.2 U6.13 U6.14 U6.15
NetF12_3: F12.3 F12.4 FMB_B.1 J1.4 | length 593
  Top Layer w80: F12.4@14802.36,14493.42 FMB_B.1 F12.3@14946.46,14491.42
  Top Layer w100: J1.4 14667.6,14491.42 F12.3
NetF13_1: F13.1 F13.2 U7.22 U7.23 U7.24
NetF13_3: F13.3 F13.4 FMB_C.1 J1.3 | length 612.6
  Top Layer w80: F13.4 FMB_C.1 F13.3
  Top Layer w100: J1.3 14717.8,14699.1 F13.3
NetF14_1: F14.1 F14.2 U7.19 U7.20 U7.21
NetF14_3: F14.3 F14.4 HVC_A.1 J1.2 | length 668.6
  Top Layer w80: J1.2 F14.4@14767.99,14906.77 ; F14.4@14767.99,14906.77 F14.3 HVC_A.1 F14.4 14769.99,14908.77 F14.4@14767.99,14906.77
NetF15_1: F15.1 F15.2 U7.13 U7.14 U7.15
NetF15_3: F15.3 F15.4 HVC_B.1 J1.1 | length 665.4
  Top Layer w80: J1.1 14802.36,15098.62 F15.4 ; F15.4 HVC_B.1 F15.3 F15.4
NetFMB_A_EN_1: FMB_A_EN.1 PB1.42 R11.2 | length 1241.8
  Top Layer w10: R11.2 16021.65,13489.17 16005.91,13504.92 15965.55,13504.92 15920.28,13550.2 FMB_A_EN.1 15920.28,13702.25 16104.36,13886.34 16183.33,13886.34 16204.04,13865.63 16631.16,13865.63 16680.79,13816 PB1.42
NetFMB_B_EN_1: FMB_B_EN.1 PB1.51 R24.2 | length 850.7
  Top Layer w10: R24.2 FMB_B_EN.1@16174.21,14276.57 ; FMB_B_EN.1 16266.37,14270.67 16374.17,14162.87 16488.7,14162.87 16548.7,14102.87 16760.98,14102.87 16768.59,14095.26 16768.59,14094.6 ; 16768.59,14093.82 16768.59,14094.6 ; PB1.51 16769.37,14093.82 16768.59,14094.6
NetFMB_C_EN_1: FMB_C_EN.1 PB1.53 R34.2 | length 1155.1
  Top Layer w10: R34.2 15908.46,14352.36 15939.72,14321.1 16645.67,14321.1 16683.07,14283.7 FMB_C_EN.1 16733.54,14146.38 16764.06,14146.38 16789.06,14121.38 PB1.53
NetHVC_A_EN_1: HVC_A_EN.1 PB1.55 R35.2 | length 1114.7
  Top Layer w10: R35.2 15986.22,14350.94 15996.06,14341.1 16680.55,14341.1 HVC_A_EN.1 16825.79,14119.8 16808.74,14102.76 PB1.55
NetHVC_B_EN_1: HVC_B_EN.1 PB1.59 R37.2 | length 1480
  Top Layer w10: R37.2 15986.22,14569.44 16030.75,14524.91 16030.75,14379.57 16049.21,14361.1 16846.57,14361.1 16966.54,14241.14 HVC_B_EN.1 16919.06,14148.39 16895.43,14148.39 16848.11,14101.06 PB1.59
NetJ1_13: J1.13 J1.14 K?.85 | length 2967.8
  Top Layer w50: J1.14 J1.13 14468.5,15010.28 14796.26,15338.03 15077.4,15338.03 15079.4,15336.03 15353.96,15336.03 15413.48,15395.55 16426.06,15395.55 16427.17,15396.65 16495.08,15328.74 K?.85
NetMC_A_EN_1: MC_A_EN.1 PB1.21 R21.2 | length 630.6
  Top Layer w10: MC_A_EN.1 16021.65,13979.33 R21.2 16065.64,14035.43 16133.08,14102.87 16463.07,14102.87 16474.1,14091.85 PB1.21
NetMC_B_EN_1: MC_B_EN.1 PB1.23 R22.2 | length 550.2
  Top Layer w10: R22.2 16074.48,14115.81 MC_B_EN.1 16140.91,14122.87 16471.61,14122.87 16493.78,14100.71 PB1.23
NetPB1_16: PB1.16 R12.2 | length 1477.2
  Top Layer w10: v1(15676.18,12937.99) 15716.18,12977.99 15806.63,12977.99 15819.42,12965.2 15880.55,12965.2 16340.87,13425.51 16340.87,13544.96 16424.84,13628.94 16424.84,13761.34 16424.1,13761.34 PB1.16
  Bottom Layer w10: R12.2 15649.61,12964.57 v1(15676.18,12937.99)
NetPB1_18: PB1.18 R13.2 | length 1589.9
  Top Layer w10: v1(15745.08,12937.99) 15881.63,12937.99 16360.87,13417.23 16360.87,13536.06 16444.57,13619.77 PB1.18
  Bottom Layer w10: R13.2 15571.85,12983.89 15657.75,12897.99 15705.08,12897.99 v1(15745.08,12937.99)
NetPB1_20: PB1.20 R14.2 | length 2276.1
  Top Layer w10: v1(15676.18,12857.28) 15716.89,12897.99 15869.91,12897.99 16380.87,13408.94 16380.87,13527.52 16464.25,13610.91 PB1.20
  Bottom Layer w10: R14.2 15570.87,13605.98 15549.21,13627.64 15514.66,13627.64 15492.91,13605.89 15492.91,13034.54 15670.17,12857.28 v1(15676.18,12857.28)
NetPB1_22: PB1.22 R15.2 | length 2503.3
  Top Layer w10: v1(15745.08,12857.28) 15857.49,12857.28 16400.87,13400.66 16400.87,13518.98 16483.94,13602.05 PB1.22
  Bottom Layer w10: R15.2 15648.62,13626.97 15627.95,13647.64 15506.38,13647.64 15472.91,13614.17 15472.91,13026.26 15636.18,12862.99 15636.18,12840.71 15659.61,12817.28 15705.08,12817.28 v1(15745.08,12857.28)
NetPB1_24: PB1.24 R25.2 | length 2880.5
  Top Layer w10: v1(15676.18,12776.57) 15716.89,12817.28 15845.77,12817.28 16420.87,13392.37 16420.87,13510.43 16503.62,13593.19 PB1.24
  Bottom Layer w10: R25.2 15648.62,13945.87 15623.7,13920.94 15469.9,13920.94 15452.91,13903.96 15452.91,13017.97 15616.18,12854.71 15616.18,12832.43 15672.04,12776.57 v1(15676.18,12776.57)
NetPB1_25: PB1.25 R23.2 VCU_EN.1 | length 581.9
  Top Layer w10: R23.2 16086.32,14196.19 16091.15,14201.02 16267.48,14201.02 VCU_EN.1 16325.63,14142.87 16480.16,14142.87 16513.47,14109.57 PB1.25
NetPB1_26: PB1.26 R26.2 | length 2920.4
  Top Layer w10: v1(15745.08,12776.57) 15833.35,12776.57 16440.87,13384.09 16440.87,13501.89 16523.31,13584.33 PB1.26
  Bottom Layer w10: R26.2 15570.87,13952.76 15559.06,13940.94 15461.61,13940.94 15432.91,13912.24 15432.91,13009.69 15596.18,12846.42 15596.18,12800.01 15659.61,12736.57 15705.08,12736.57 v1(15745.08,12776.57)
NetPB1_27: PB1.27 R39.2 | length 5022.6
  Top Layer w10: v1(15745.08,12615.16) 15785.07,12615.16 16520.87,13350.95 16520.87,13468.49 16602.36,13549.99 16602.36,13687.11 16633.86,13718.61 16928.3,13718.61 16935.91,13726.22 16935.91,13798.01 16928.3,13805.63 16719.44,13805.63 16639.44,13885.63 16573.82,13885.63 16533.15,13926.3 PB1.27
  Bottom Layer w10: R39.2 15571.85,14672.24 15561.02,14661.42 15374.37,14661.42 15352.91,14639.96 15352.91,12976.55 15516.18,12813.28 15516.18,12718.59 15659.61,12575.16 15705.08,12575.16 v1(15745.08,12615.16)
NetPB1_28: PB1.28 R27.2 | length 3548.7
  Top Layer w10: v1(15676.18,12695.87) 15716.89,12736.57 15821.63,12736.57 16460.87,13375.81 16460.87,13493.35 16542.99,13575.47 PB1.28
  Bottom Layer w10: R27.2 15570.87,14443.9 15557.4,14457.36 15424.82,14457.36 15412.91,14445.46 15412.91,13001.4 15576.18,12838.14 15576.18,12791.72 15672.04,12695.87 v1(15676.18,12695.87)
NetPB1_29: PB1.29 R40.2 | length 5800
  Top Layer w10: v1(15676.18,12534.45) 15732.65,12534.45 16540.87,13342.67 16540.87,13460.21 16622.36,13541.71 16622.36,13678.83 16642.14,13698.61 16936.58,13698.61 17000.88,13762.9 17000.88,13870.12 16974.81,13896.18 16937.95,13896.18 16867.4,13825.63 16727.73,13825.63 16647.73,13905.63 16582.1,13905.63 16552.84,13934.9 PB1.29
  Bottom Layer w10: R40.2 15633.86,15122.05 15616.14,15139.76 15406.5,15139.76 15330.75,15064.02 15332.91,15061.85 15332.91,12968.27 15496.18,12805 15496.18,12710.3 15672.04,12534.45 v1(15676.18,12534.45)
NetPB1_30: PB1.30 R28.2 | length 3774.5
  Top Layer w10: v1(15745.08,12695.87) 15809.21,12695.87 16480.87,13367.52 16480.87,13485.06 16562.68,13566.87 PB1.30
  Bottom Layer w10: R28.2 15648.62,14460.63 15631.89,14477.36 15416.54,14477.36 15392.91,14453.74 15392.91,12993.12 15556.18,12829.85 15556.18,12759.3 15659.61,12655.87 15705.08,12655.87 v1(15745.08,12695.87)
NetPB1_32: PB1.32 R38.2 | length 4037.8
  Top Layer w10: v1(15676.18,12615.16) 15716.89,12655.87 15797.49,12655.87 16500.87,13359.24 16500.87,13476.78 16582.36,13558.28 PB1.32
  Bottom Layer w10: R38.2 15649.61,14681.1 15609.92,14641.42 15382.65,14641.42 15372.91,14631.68 15372.91,12984.84 15536.18,12821.57 15536.18,12751.01 15672.04,12615.16 v1(15676.18,12615.16)
NetPB1_33: PB1.33 R6.1 V_M.1 | length 1391.3
  Top Layer w10: PB1.33 16592.21,14023.94 16600.29,14015.85 16768.7,14015.85 16788.74,13995.81 16788.74,13968.67 16812.17,13945.24 16845.31,13945.24 16861.79,13961.72 16999.17,13961.72 17006.78,13969.33 17006.78,14159.35 17015,14167.57 17015,14220.96 16854.86,14381.1 16665.35,14381.1 16622.24,14424.21 V_M.1
  Bottom Layer w10: R6.1 16472.8,14424.21 V_M.1
NetPB1_57: PB1.57 R1.1 U1.2 | length 808.1
  Top Layer w10: PB1.57 16828.43,13985.55 v1(16828.74,13985.24)
  Bottom Layer w10: R1.1 16569.88,13531.5 U1.2 16575.79,13575.55 16586.61,13586.38 16595.58,13586.38 16600.98,13591.77 16692.4,13591.77 16709.88,13609.25 ; 16710.87,13609.25 16710.87,13682.67 16779.93,13751.73 16783.77,13751.73 16792.56,13760.52 16792.56,13949.06 v1(16828.74,13985.24)
NetR3_2: R3.2 U2.7 | length 103.9
  Bottom Layer w10: R3.2 15994.09,12469.49 16004.92,12458.66 U2.7
NetR4_1: R4.1 U2.3 | length 135.1
  Bottom Layer w10: R4.1 15959.65,12261.81 15979.33,12242.13 U2.3
NetR4_2: R4.2 U2.2 | length 195.4
  Bottom Layer w10: R4.2 15922.98,12336.61 16004.92,12254.67 ; U2.2 16004.92,12250.98
NetR5_1: R5.1 R6.2 R7.2 | length 155.5
  Bottom Layer w30: R5.1 R6.2
NetR8_1: R8.1 U5.3 | length 178.5
  Top Layer w10: U5.3 15826.97,13238.58 15841.83,13223.72 15842.11,13223.72 15861.62,13204.21 R8.1@15946.34,13204.21
NetR9_1: R9.1 U5.5 | length 171.1
  Top Layer w10: U5.5 15837.56,13301.58 15854.92,13284.21 R9.1@15945.96,13284.21
NetR10_1: R10.1 U5.7 | length 164.6
  Top Layer w10: U5.7 15782.03,13364.92 R10.1@15946.29,13364.92
NetR11_1: R11.1 U5.9 | length 172.1
  Top Layer w10: U5.9 15843.55,13427.56 15861.62,13445.63 R11.1@15946.61,13445.63
NetR12_1: R12.1 R16.2 U5.4 | length 351.9
  Top Layer w10: U5.4 15823.75,13270.08 15849.62,13244.21 v1(15878.19,13244.21)
  Bottom Layer w10: R12.1 R16.2 ; 15727.36,13255.91 15741.38,13269.92 15840.86,13269.92 15866.57,13244.21 v1(15878.19,13244.21)
NetR13_1: R13.1 R17.2 U5.6 | length 729
  Top Layer w10: U5.6 15870.04,13333.07 v1(15878.19,13324.92)
  Bottom Layer w10: R13.1 15571.85,13251.97 15609.8,13289.92 15843.19,13289.92 v1(15878.19,13324.92) 15878.19,13324.21 15918.19,13284.21 15918.19,13227.64 15894.76,13204.21 15861.62,13204.21 15836.5,13229.33 R17.2 ; R17.2@15786.42,13237.2 15790.35,13233.27 15805.12,13233.27 R17.2@15805.12,13236.22
NetR14_1: R14.1 R18.2 U5.8 | length 718.1
  Top Layer w10: U5.8 15868.62,13396.06 v1(15878.19,13405.63)
  Bottom Layer w10: R14.1 15570.87,13465.55 15596.02,13440.39 15843.43,13440.39 v1(15878.19,13405.63) 15920.7,13448.14 15920.7,13502.46 15896.82,13526.34 15861.62,13526.34 15836.27,13500.98 R18.2
NetR15_1: R15.1 R19.2 U5.10 | length 358.2
  Top Layer w10: U5.10 15846.76,13459.06 15874.04,13486.34 15874.49,13485.89 v1(15880.7,13485.89)
  Bottom Layer w10: R15.1 R19.2 ; 15726.38,13473.43 15739.41,13460.39 15852.24,13460.39 15877.74,13485.89 v1(15880.7,13485.89)
NetR20_1: R20.1 U5.2 | length 115.5
  Top Layer w20: U5.2 15823.11,13207.09 15862.2,13167.99 R20.1
NetR21_1: R21.1 U6.3 | length 178.7
  Top Layer w10: U6.3 15826.73,14069.17 15861.1,14034.8 R21.1@15946.22,14034.8
NetR22_1: R22.1 U6.5 | length 171.2
  Top Layer w10: U6.5 15837.32,14132.17 15854.68,14114.8 R22.1@15945.84,14114.8
NetR23_1: R23.1 U6.7 | length 164.7
  Top Layer w10: U6.7 15781.79,14195.51 R23.1@15946.17,14195.51
NetR24_1: R24.1 U6.9 | length 172.2
  Top Layer w10: U6.9 15843.31,14258.15 15861.38,14276.22 R24.1@15946.5,14276.22
NetR25_1: R25.1 R29.2 U6.4 | length 354.3
  Top Layer w10: U6.4 15823.52,14100.67 15849.38,14074.8 v1(15877.95,14074.8)
  Bottom Layer w10: R25.1 R29.2 ; R29.2@15726.38,14086.61 15742.36,14102.6 15839.87,14102.6 15867.67,14074.8 v1(15877.95,14074.8)
NetR26_1: R26.1 R30.2 U6.6 | length 721.3
  Top Layer w10: U6.6 15869.8,14163.66 v1(15877.95,14155.51)
  Bottom Layer w10: R26.1 15570.87,14082.68 15610.79,14122.6 15845.04,14122.6 v1(15877.95,14155.51) ; R30.2 15837.95,14062.01 15837.95,14034.8 15894.52,14034.8 15917.95,14058.24 15917.95,14114.8 v1@15877.95,14154.8
NetR27_1: R27.1 R31.2 U6.8 | length 708
  Top Layer w10: U6.8 15868.39,14226.65 v1(15877.95,14236.22)
  Bottom Layer w10: R27.1 15570.87,14311.02 15605.87,14276.02 15838.15,14276.02 v1(15877.95,14236.22) 15917.12,14275.39 15917.12,14333.19 15893.69,14356.62 15860.55,14356.62 15840.54,14336.61 R31.2
NetR28_1: R28.1 R32.2 U6.10 | length 346.1
  Top Layer w10: U6.10 15846.52,14289.65 v1@15873.5,14316.62
  Bottom Layer w10: R28.1 R32.2 ; 15726.38,14311.02 15741.38,14296.02 15839.87,14296.02 15860.47,14316.62 v1(15877.12,14316.62)
NetR33_1: R33.1 U6.2 | length 96.7
  Top Layer w20: U6.2 15822.87,14037.68 R33.1@15862.2,13998.34
NetR34_1: R34.1 U7.3 | length 385.9
  Top Layer w10: U7.3 15826.73,14788.66 15874.01,14741.38 15897.95,14741.38 15906.73,14732.59 R34.1@15906.73,14494.84
NetR35_1: R35.1 U7.5 | length 499.1
  Top Layer w10: U7.5 15837.32,14851.65 15854.68,14834.29 15894.52,14834.29 15926.73,14802.08 15926.73,14586.06 15986.22,14526.57 R35.1
NetR36_1: R36.1 U7.7 | length 490.2
  Top Layer w10: U7.7 15781.79,14915 15881.89,14915 ; 15882.24,14915.35 15882.6,14915 15894.52,14915 15908.93,14900.59 v1(15945.87,14900.59)
  Bottom Layer w10: R36.1 15834.65,15112.2 15870.43,15076.42 15894.52,15076.42 15945.87,15025.07 v1(15945.87,14900.59)
NetR37_1: R37.1 U7.9 | length 484.4
  Top Layer w10: U7.9 15843.31,14977.64 15861.38,14995.71 15909.28,14995.71 15986.22,14918.77 R37.1
NetR38_1: R38.1 R41.2 U7.4 | length 352.1
  Top Layer w10: U7.4 15823.52,14820.16 15849.38,14794.29 v1(15877.95,14794.29)
  Bottom Layer w10: R38.1 R41.2 ; 15727.36,14811.02 15739.41,14823.07 15840.86,14823.07 15869.64,14794.29 v1(15877.95,14794.29)
NetR39_1: R39.1 R42.2 U7.6 | length 705.9
  Top Layer w10: U7.6 15869.8,14883.15 v1(15877.95,14875)
  Bottom Layer w10: R39.1 15571.85,14806.1 15608.82,14843.07 15846.02,14843.07 v1(15877.95,14875) 15877.95,14874.29 15917.95,14834.29 15917.95,14777.72 15894.52,14754.29 15861.38,14754.29 15833.2,14782.48 R42.2
NetR40_1: R40.1 R44.2 U7.10 | length 593.1
  Top Layer w10: U7.10 15846.52,15009.13 15873.81,15036.42 v1(15877.95,15036.42)
  Bottom Layer w10: R40.1 R44.2 15711.61,14948.82 15744.72,14915.71 15896.75,14915.71 15917.95,14936.91 15917.95,14972.28 15877.95,15012.28 v1(15877.95,15036.42)
NetR43_2: R43.2 U7.8 | length 236.2
  Top Layer w10: U7.8 15868.39,14946.14 v1(15877.95,14955.71)
  Bottom Layer w10: R43.2 15789.37,14970.47 15804.13,14955.71 v1(15877.95,14955.71)
NetR45_1: R45.1 U7.2 | length 96.7
  Top Layer w20: U7.2 15822.87,14757.17 R45.1@15862.2,14717.83
SHANK_GND: J2.1 R2.2 SH_GND.1 U2.1 U2.5 U2.6 | length 990.3
  Bottom Layer w15: U2.1 16030.51,11989.17 16053.15,11966.54 R2.2
  Bottom Layer w41.34: 15966.38,12398.62 15966.38,12343.66 16060.59,12249.45 16161.97,12249.45 16204.72,12206.69 R2.2
pads on no net: J1.0 PB1.0 PB1.14 PB1.15 PB1.35 PB1.37 PB1.38 PB1.39 PB1.41 PB1.43 PB1.44 PB1.45 PB1.46 PB1.47 PB1.48 PB1.49 PB1.50 PB1.52 PB1.54 PB1.56 PB1.58 PB1.60 PB1.61 PB1.62 PB1.63 PB1.64 PB1.65 PB1.66 PB1.67 U1.3 U7.16 U7.17 U7.18

## Polygon pours and split planes (outlines as drawn)
NetF15_1 on Top Layer "HVC_B" (solid, pour order 68): 15042.32,15175.2 15042.32,15055.12 ccw(c15076.22,15055.12) 15076.22,15021.22 15325.79,15021.22 cw(c15325.79,14997.6) 15349.41,14997.6 15427.17,14997.6 15427.16,15173.23 ccw(c15390.69,15173.23) 15390.69,15209.7 15076.83,15209.7 ccw(c15076.83,15175.2)
NetF14_1 on Top Layer "HVC_A" (solid, pour order 66): 15427.16,14892.8 15427.17,14810.04 15365.16,14810.04 15067.91,14810.04 cw(c15067.91,14835.63) 15042.32,14835.63 15042.32,14976.38 cw(c15067.91,14976.38) 15067.91,15001.97 15322.83,15001.97 cw(c15322.83,14978.35) 15346.46,14978.35 15346.46,14913.43 ccw(c15366.77,14913.43) 15366.66,14893.11
NetF1_1 on Top Layer "12V_IN_1" (solid, pour order 26): 17098.14,15541.1 17098.14,15172.52 17098.15,14520.39 cw(c17065.95,14520.39) 17065.95,14488.19 16675.2,14488.19 cw(c16675.2,14518.7) 16644.68,14518.7 16644.69,14972.44 ccw(c16617.13,14972.44) 16617.13,15000 16595.47,15000 cw(c16595.47,15023.4) 16572.07,15023.4 16572.07,15541.1
NetF9_1 on Top Layer "MC_A" (solid, pour order 42): 15415.35,14079.72 15475.39,14079.72 15475.39,13801.18 cw(c15448.82,13801.18) 15448.82,13774.61 15067.91,13774.61 cw(c15067.91,13800.2) 15042.32,13800.2 15042.32,13940.95 cw(c15063.98,13940.94) 15063.98,13962.6 15326.77,13962.6 ccw(c15326.77,13982.28) 15346.46,13982.28 15346.46,14068.9 cw(c15357.28,14068.9) 15357.28,14079.73
NetF12_1 on Top Layer "FMB_B" (solid, pour order 44): 15415.35,14279.09 15475.39,14279.09 15475.39,14553.15 ccw(c15444.33,14553.15) 15444.33,14584.21 15066.5,14584.21 ccw(c15066.5,14560.04) 15042.32,14560.04 15042.32,14421.26 ccw(c15067.36,14421.26) 15067.36,14396.22 15325.24,14396.22 cw(c15325.24,14375) 15346.46,14375 15346.46,14292.32 ccw(c15359.68,14292.32) 15359.69,14279.09
NetF11_1 on Top Layer "VCU" (solid, pour order 46): 15427.16,14267.8 15427.17,14185.04 15365.16,14185.04 15067.91,14185.04 cw(c15067.91,14210.63) 15042.32,14210.63 15042.32,14351.38 cw(c15067.91,14351.38) 15067.91,14376.97 15313.98,14376.97 cw(c15313.98,14355.32) 15335.63,14355.32 15335.63,14280.51 ccw(c15347.93,14280.51) 15347.93,14268.21
NetF10_1 on Top Layer "MC_B" (solid, pour order 48): 15427.16,14091.02 15427.17,14173.78 15365.16,14173.78 15069.45,14173.78 ccw(c15069.45,14146.65) 15042.32,14146.65 15042.32,14007.87 ccw(c15068.35,14007.87) 15068.35,13981.85 15318,13981.85 ccw(c15318,13999.48) 15335.63,13999.48 15335.63,14077.7 cw(c15348.06,14077.7) 15347.93,14090.13
NetF8_1 on Top Layer "FMB_A" (solid, pour order 50): 15415.59,13448.5 15475.63,13448.5 15475.63,13722.56 ccw(c15444.57,13722.56) 15444.57,13753.62 15066.73,13753.62 ccw(c15066.73,13729.45) 15042.56,13729.45 15042.56,13590.67 ccw(c15067.6,13590.67) 15067.6,13565.63 15325.47,13565.63 cw(c15325.47,13544.41) 15346.69,13544.41 15346.69,13461.73 ccw(c15359.92,13461.73) 15359.92,13448.5
NetF7_1 on Top Layer "DA" (solid, pour order 52): 15427.4,13437.21 15427.4,13354.45 15365.39,13354.45 15068.15,13354.45 cw(c15068.15,13380.04) 15042.56,13380.04 15042.56,13520.79 cw(c15068.15,13520.79) 15068.15,13546.38 15314.21,13546.38 cw(c15314.21,13524.73) 15335.87,13524.72 15335.87,13449.92 ccw(c15348.17,13449.92) 15348.17,13437.62
NetF5_1 on Top Layer "BMS" (solid, pour order 54): 15415.59,13249.13 15475.63,13249.13 15475.63,12970.59 cw(c15449.06,12970.59) 15449.05,12944.02 15068.15,12944.02 cw(c15068.15,12969.61) 15042.56,12969.61 15042.56,13110.35 cw(c15064.21,13110.35) 15064.21,13132.01 15327.01,13132.01 ccw(c15327.01,13151.69) 15346.69,13151.69 15346.69,13238.31 cw(c15357.52,13238.31) 15357.52,13249.13
NetF6_1 on Top Layer "DCU" (solid, pour order 56): 15427.4,13260.42 15427.4,13343.19 15365.39,13343.19 15069.69,13343.19 ccw(c15069.69,13316.06) 15042.56,13316.06 15042.56,13177.28 ccw(c15068.58,13177.28) 15068.58,13151.26 15318.23,13151.26 ccw(c15318.24,13168.89) 15335.87,13168.89 15335.87,13247.11 cw(c15348.3,13247.11) 15348.16,13259.54
NetF13_1 on Top Layer "FMB_B" (solid, pour order 58): 15403.54,14605.32 15062.99,14605.32 cw(c15062.99,14625.99) 15042.32,14625.98 15042.32,14776.58 cw(c15065.94,14776.57) 15065.94,14800.2 15427.17,14800.2 15427.17,14628.94 cw(c15403.55,14628.94)
12V on Top Layer "12V_POUR" (solid, remove dead copper, pour order 74): 14110.23,15554.13 17171.26,15554.13 17171.26,11678.15 14110.24,11678.15
SHANK_GND on Bottom Layer "SH_GND_POUR" (solid, pour order 70): 16571.65,11729.06 16102.36,11729.06 16102.36,12254.13 16571.65,12254.13 17090.4,12254.13 17097.73,11729.06
GND on Bottom Layer "GND_POUR" (solid, remove dead copper, pour order 76): 14110.24,15590.55 17171.26,15590.55 17171.26,11678.15 14110.24,11678.15

## Other copper
Top Layer:
  pour cut-out: 16586.61,14859.25 16588.58,14857.28 16633.86,14857.28 16633.86,14834.49 16585.79,14834.49
  pour cut-out: 14593.91,14401.1 14593.91,14346.72 14610.24,14372.05
  pour cut-out: 14591.94,14242.63 14591.94,14188.25 14608.27,14213.58
  pour cut-out: 14586.04,13772.16 14586.04,13717.78 14602.36,13743.11
  pour cut-out: 14598.83,13771.18 14598.83,13716.79 14615.16,13742.13
  pour cut-out: 14591.94,13611.73 14591.94,13557.35 14608.27,13582.68
  pour cut-out: 14973.43,15174.21 15014.98,15174.21 15037.27,15196.5
  pour cut-out: 15488.19,13187.01 15689.9,13187.01 15689.9,13149.55 15681.1,13140.75 15488.19,13140.75
  pour cut-out: 17068.9,14460.63 17085.63,14477.36 17133.86,14477.36 17133.86,14460.63
  pour cut-out: 15744.75,13665.09 15745.6,13664.24 15795.12,13664.24 15795.12,13542.87 15742.97,13542.87
  pour cut-out: 15483.27,13433.07 15483.27,13267.13 15475.47,13259.33 15475.47,13438.31
  pour cut-out: 15483.27,14259.84 15483.27,14093.9 15475.47,14086.1 15475.47,14265.08
  pour cut-out: 15484.13,13790.34 15484.13,13732.03 15478.35,13737.81 15478.35,13754.92
  pour cut-out: 15739.17,15104.33 15739.17,15093.8 15738.33,15092.95 15739.74,15091.54 15748.03,15091.54
  pour cut-out: 15741.97,14561.85 15741.97,14511.97 15743.78,14513.78 15755.91,14513.78
Bottom Layer:
  pour cut-out: 15887.8,11920.28 15887.8,12225.39 16091.54,12225.39 16091.54,11920.28
  pour cut-out: 17095.9,12262.49 17096.97,12263.55 17120.83,12263.55 17120.83,12249.43
  pour cut-out: 16592.52,13750.98 16735.24,13750.98 16721.46,13737.2 16721.46,13733.27 16563.98,13733.27 16557.09,13740.16

## Silkscreen, mask and mechanical layers (free items; w line width, h text height)
Top Solder:
  lines w150: 15587.6,14898.9 15587.6,15196.85 15665.35,15274.61 16059.06,15274.61 16164.37,15169.29 16164.37,14503.94

## Text inside footprints (layer, text, board x,y; h text height)
D1: Bottom Overlay "k" at 15851.38,12473.43 h30 r270